# Altium PCB UmbilicalBoardV5.PcbDoc
Units mm, origin at the board's own origin, x right, y up, seen from the top; angles counter-clockwise.
Board outline 88.77 x 92.99 mm, 4 copper layers (Top Layer, GndPlane, PowerPlane, Bottom Layer), stack 0.107 mm thick; 25 components, 56 nets, 222 pads, 33 vias.
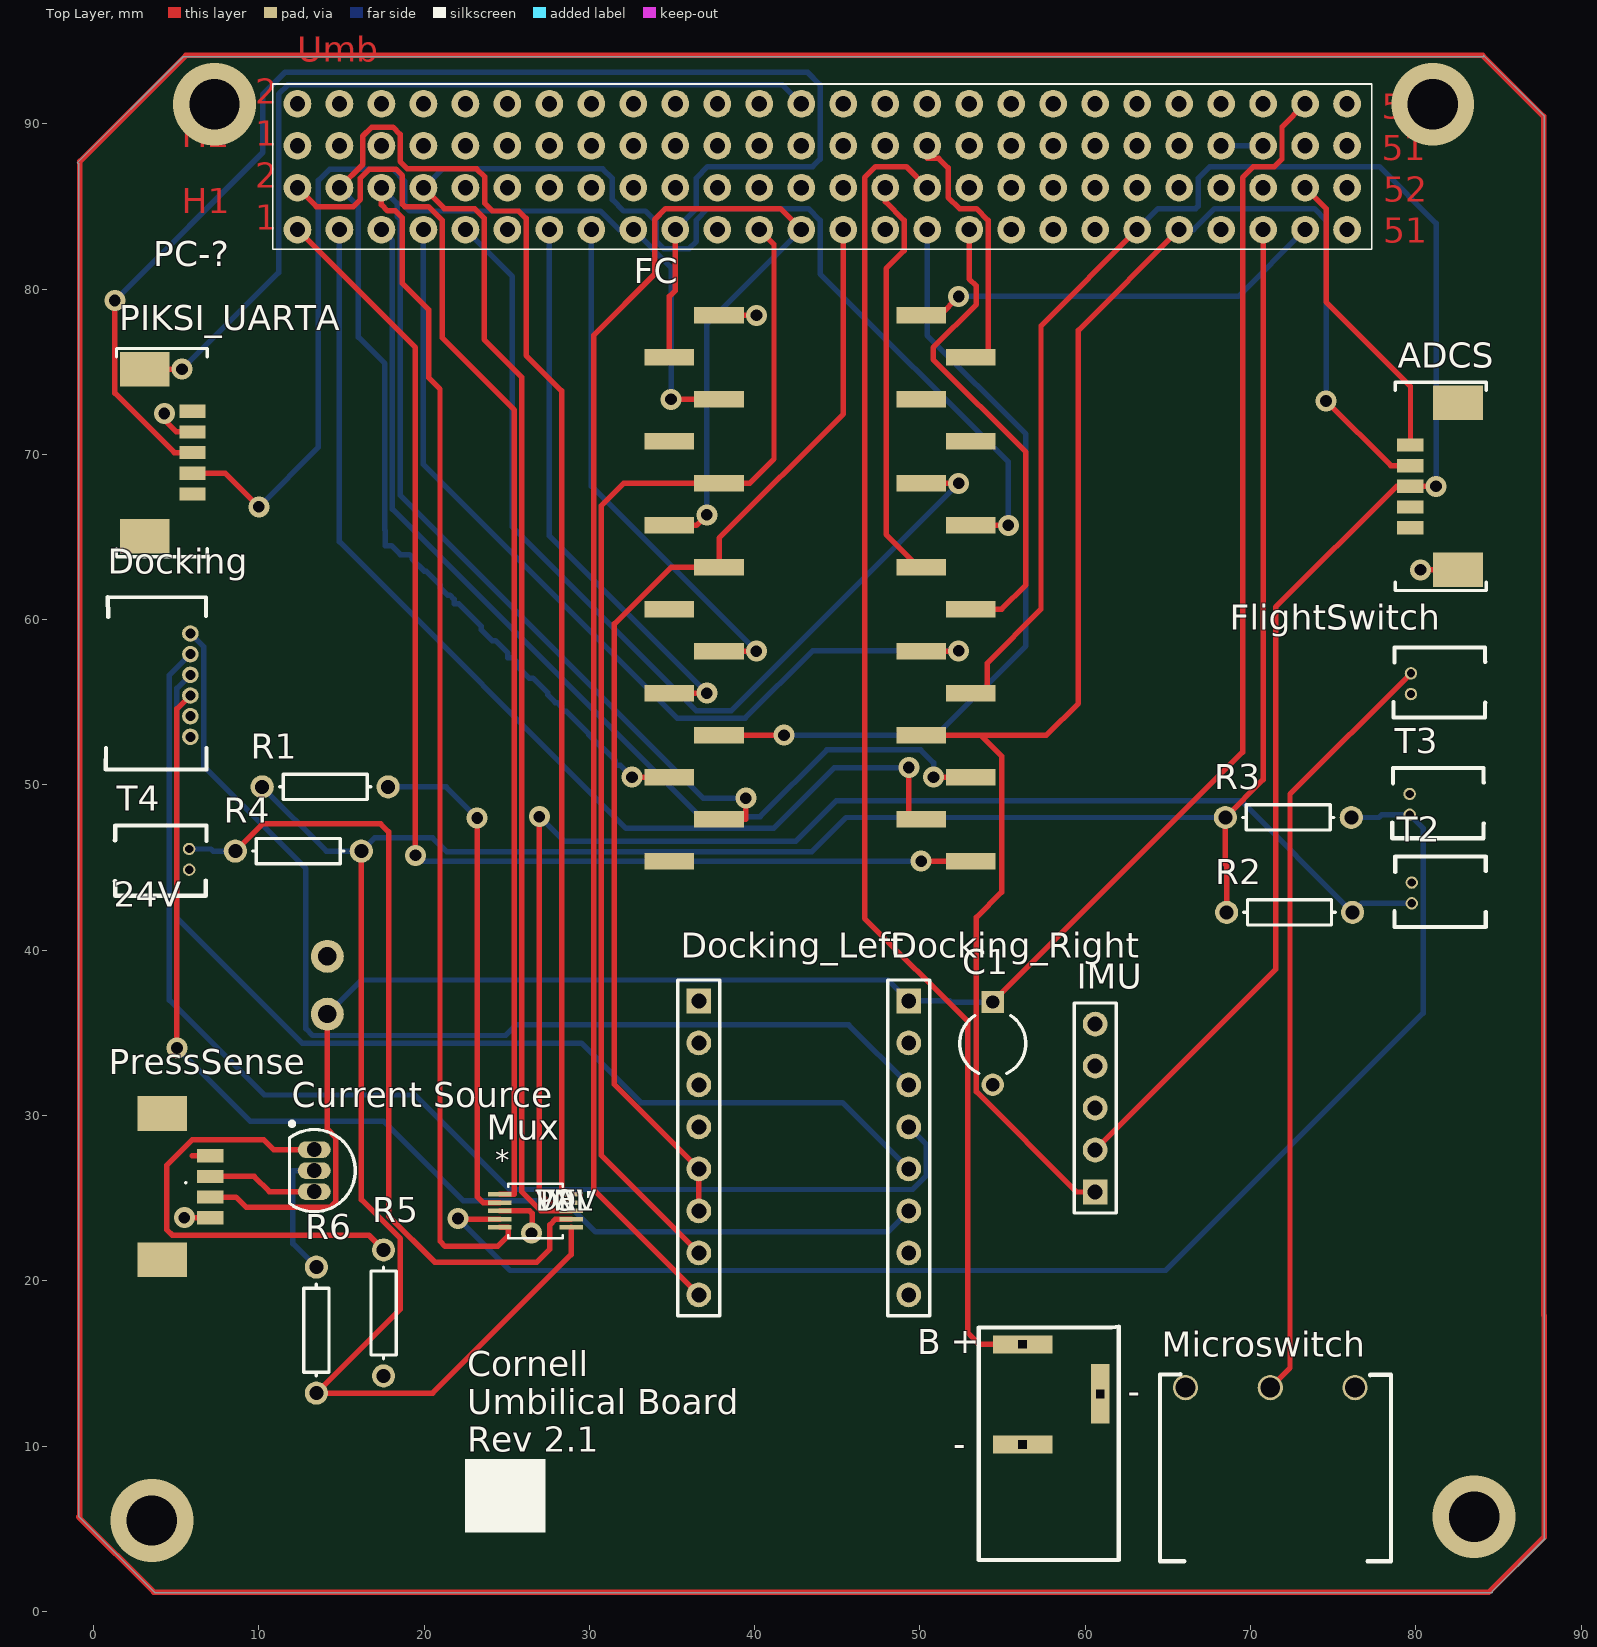
[diagram p0: Top Layer view]
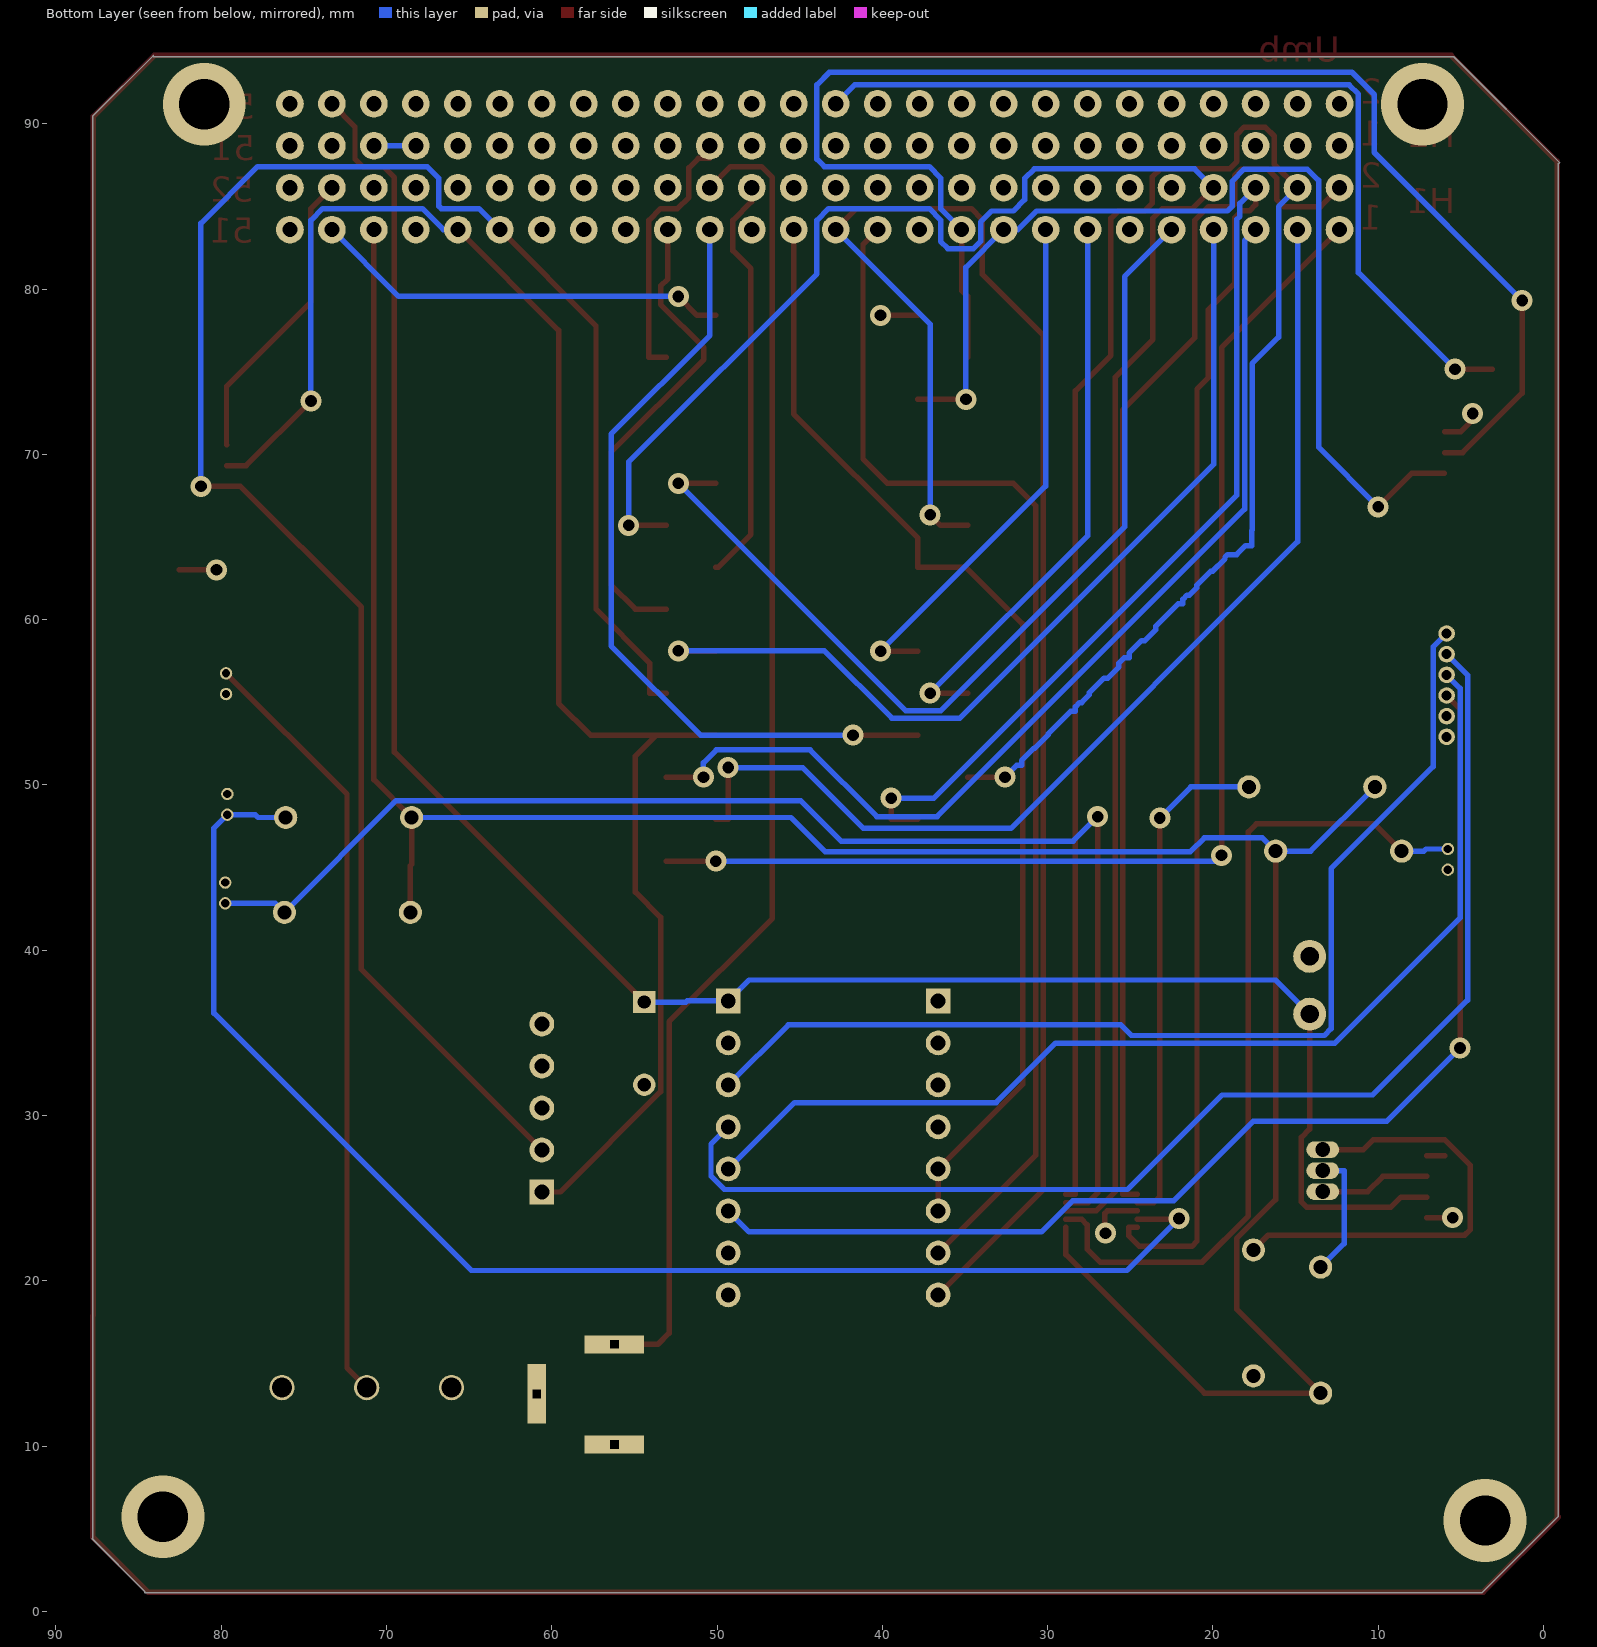
[diagram p1: Bottom Layer view, seen from below]
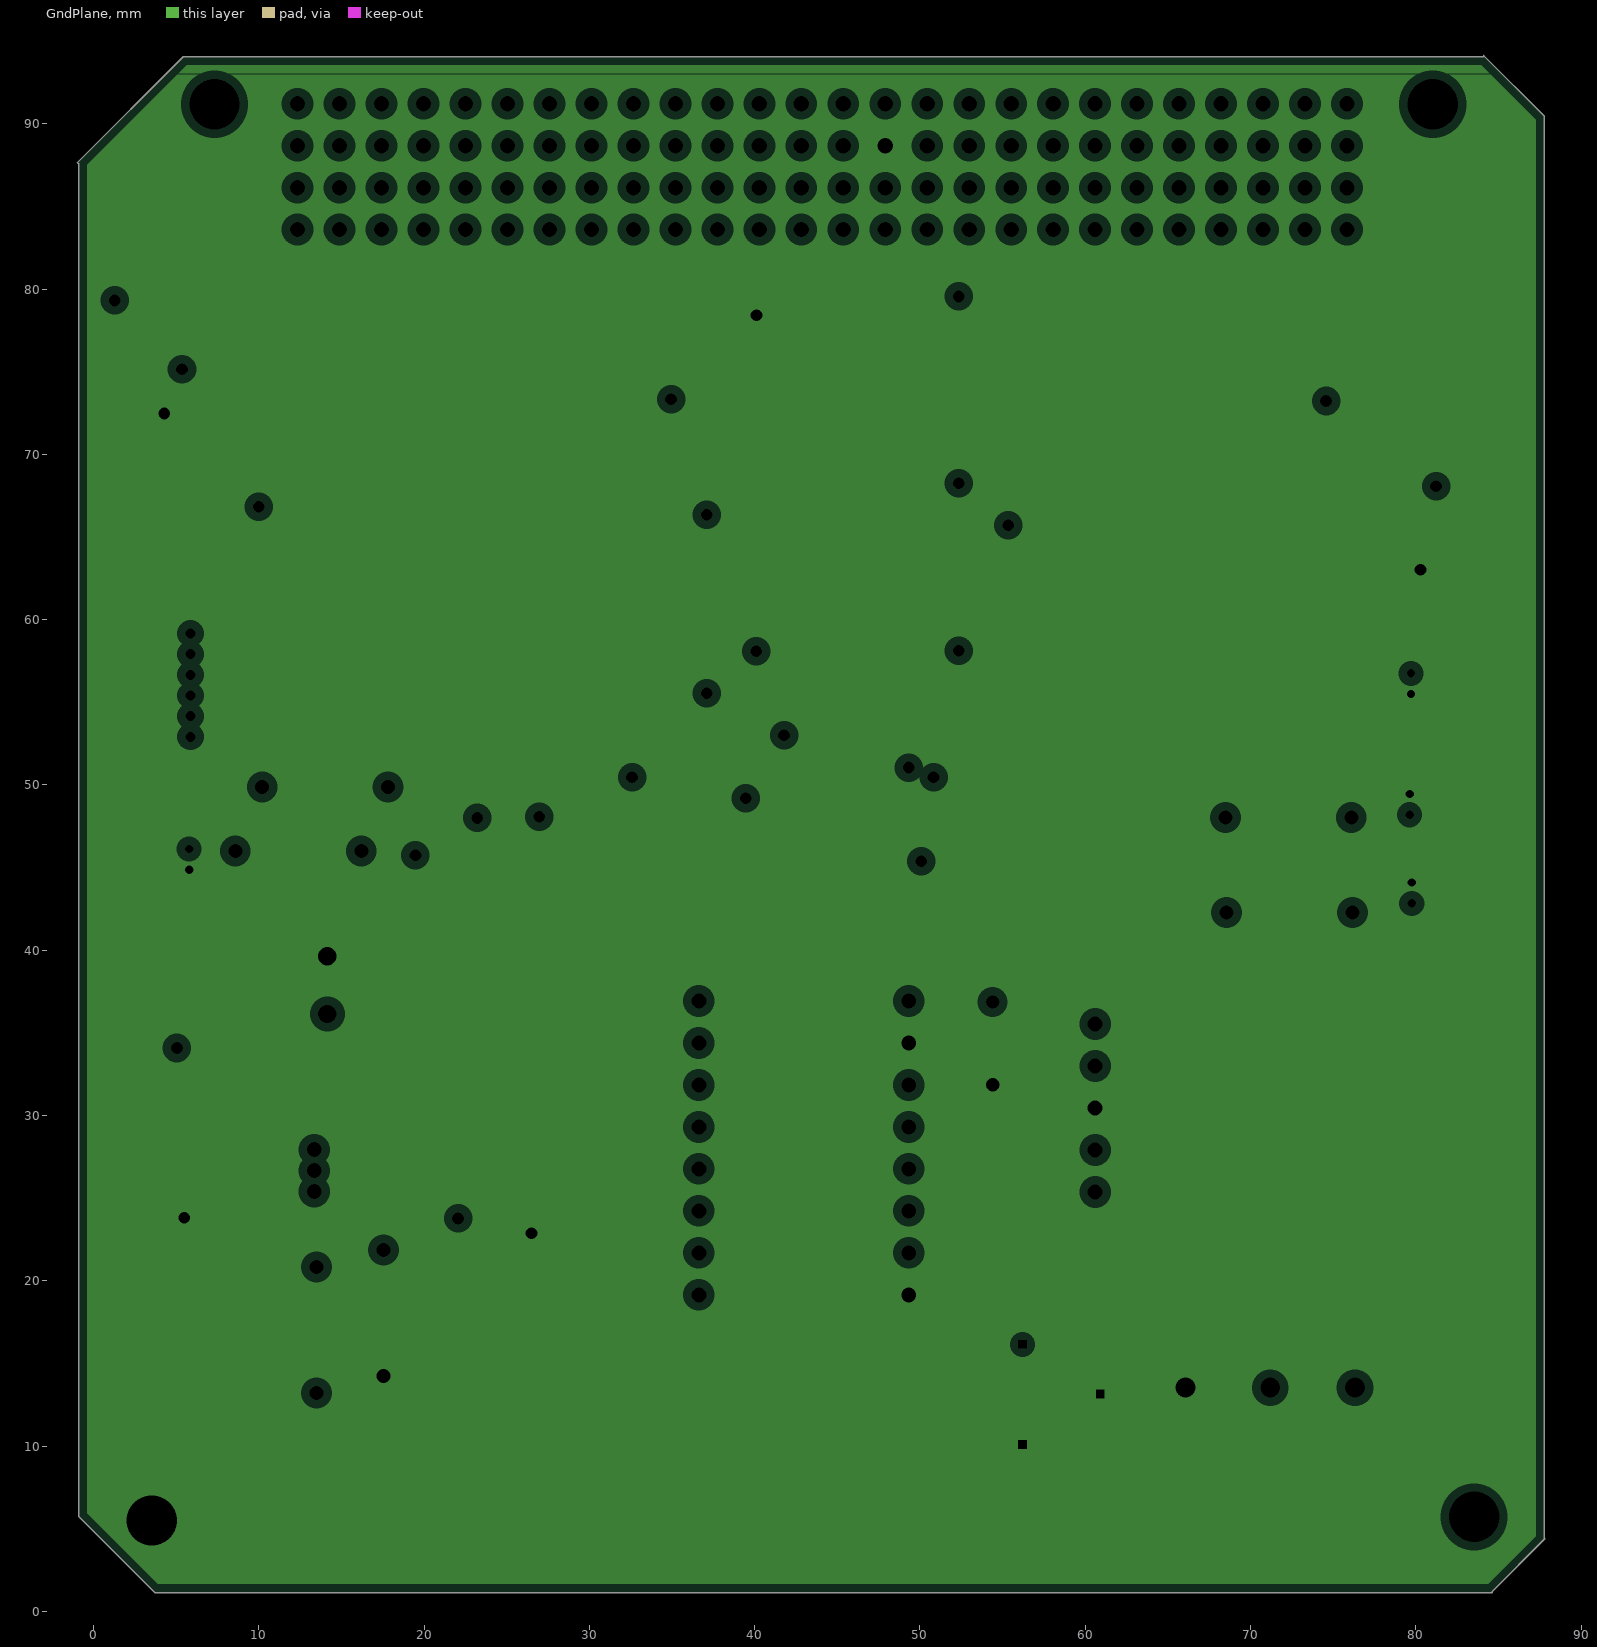
[diagram p2: GndPlane, clearances drawn from the general rule]
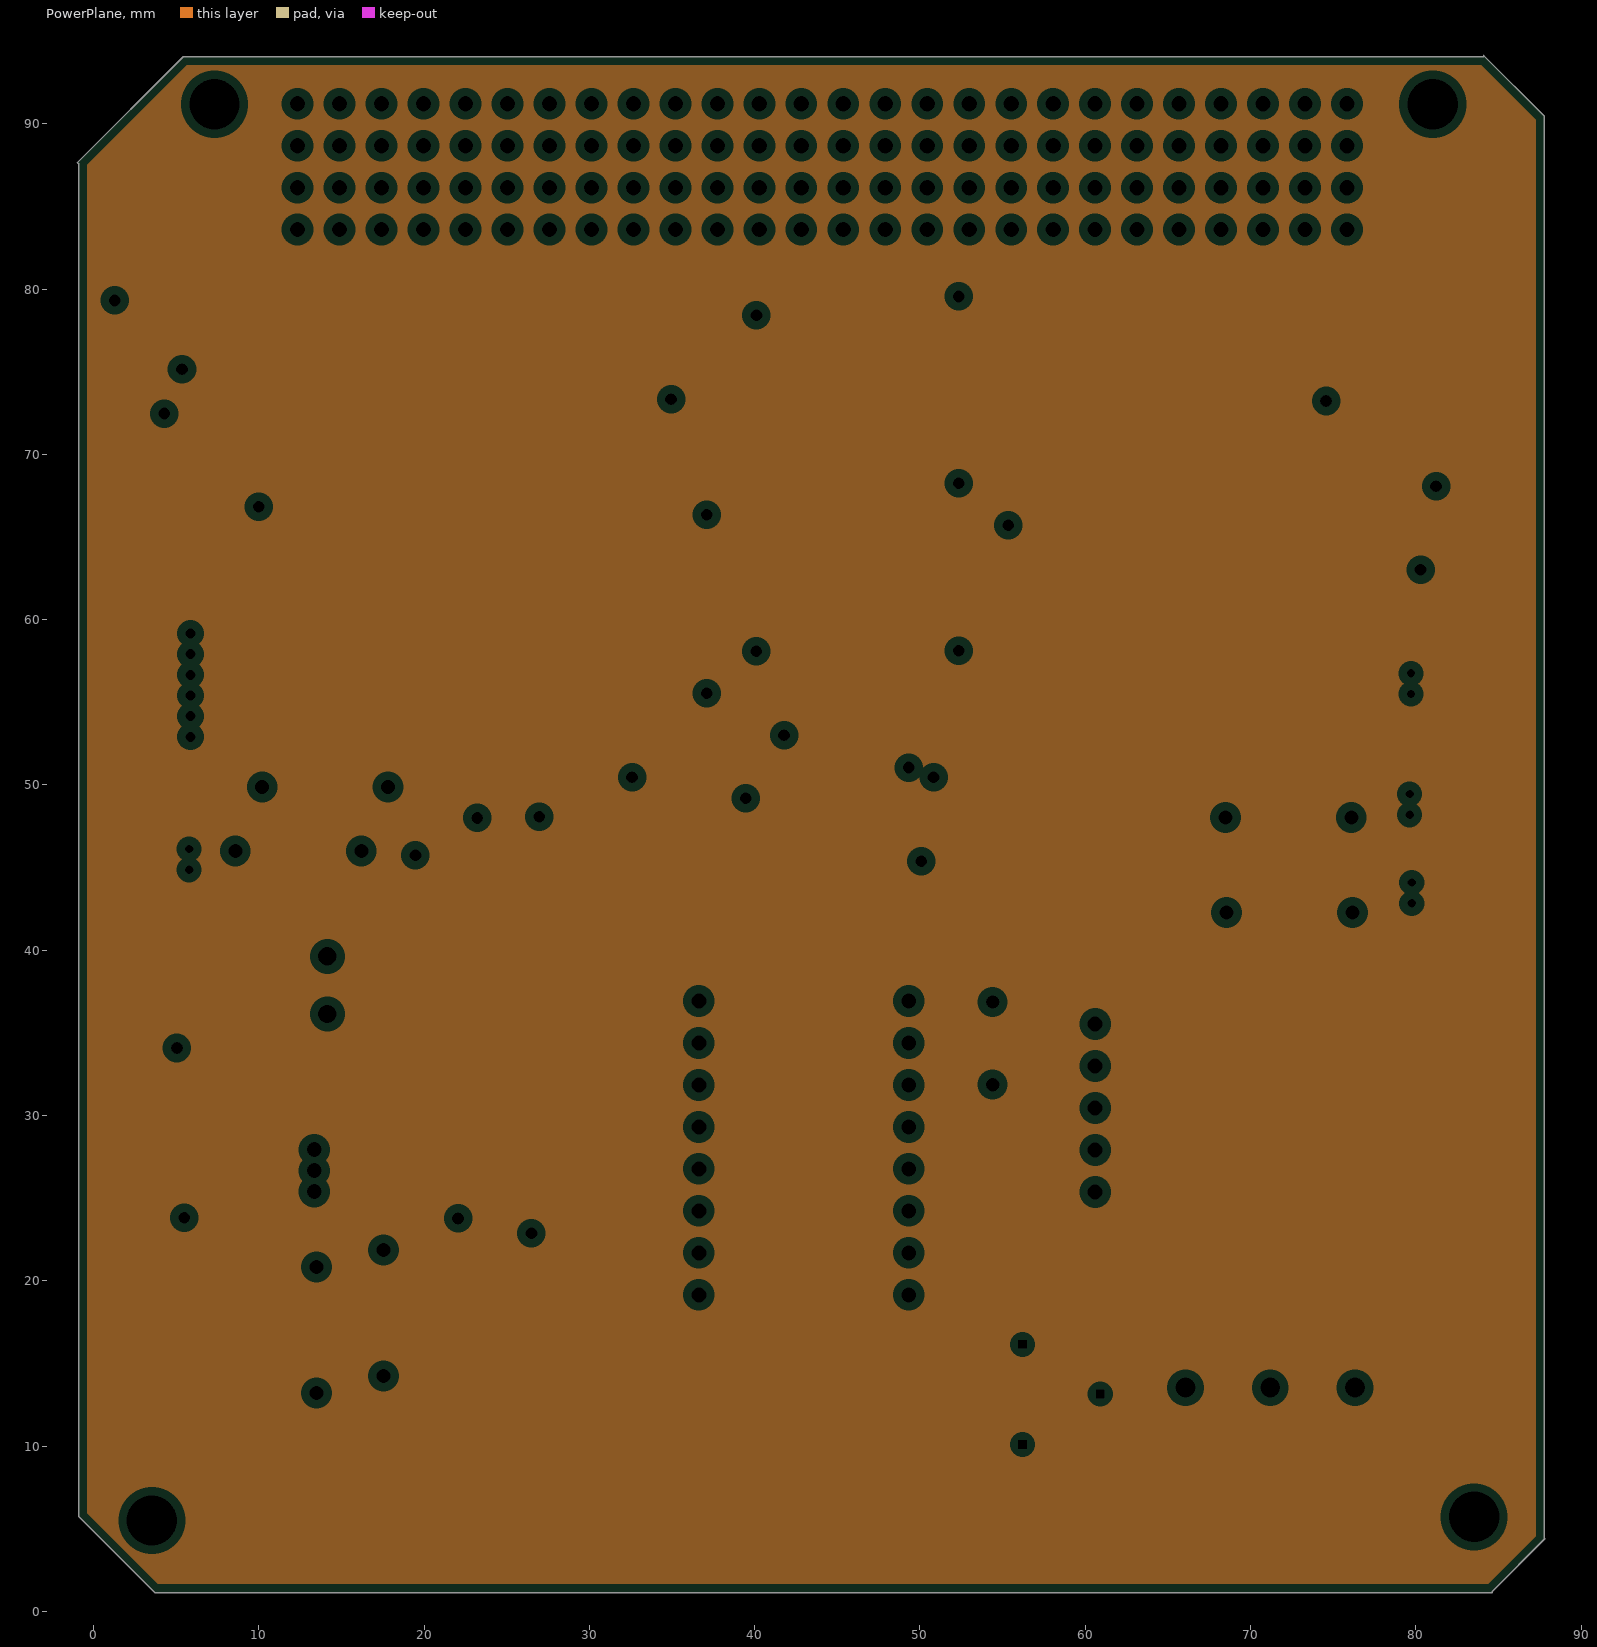
[diagram p3: PowerPlane, clearances drawn from the general rule]

## Layer stack, top to bottom
Top Solder: solder mask 0.0102, Solder Resist, Dk 3.5
Top Layer: signal copper 0.0356
GndPlane: plane copper 0.0178, net DGND
PowerPlane: plane copper 0.0178
Bottom Layer: signal copper 0.0356
Bottom Solder: solder mask 0.0102, Solder Resist, Dk 3.5

## Board outline
84.099,94.132 87.782,90.449 87.782,4.42 87.808,4.394 84.633,1.219 84.633,1.143 3.708,1.143 -0.889,5.74 -0.889,87.579 -0.965,87.655 5.436,94.056 84.099,94.056

## Design rules (kind name [scope] priority, off if disabled: settings)
Clearance [All] p1: gap=0.254 ignorepadtopadclearanceinfootprint=FALSE except(0: Arc-Hole Track-Hole SMDPad-Hole THPad-Hole Via-Hole Fill-Hole Poly-Hole Region-Hole Text-Hole; 0.127: Track-Track Track-SMDPad Track-THPad SMDPad-SMDPad SMDPad-THPad THPad-THPad)
HoleSize [All] p1: absolutevalues=TRUE maxlimit=3.048 minlimit=0.025 maxpercent=80.000 minpercent=20.000
MinimumSolderMaskSliver [All] p1: minsoldermaskwidth=0.127
PlaneClearance [All] p1: clearance=0.508
PlaneConnect [All] p1: planeconnectstyle=Direct reliefexpansion=0.508 reliefentries=4 reliefconductorwidth=0.254 reliefairgap=0.254
PolygonConnect [All] p1: connectstyle=Direct reliefconductorwidth=0.254 reliefentries=4 polygonreliefangle="90 Angle" airgapwidth=0.254
RoutingVias [All] p1: holewidth=0.711 width=1.27 viastyle="Through Hole" minholewidth=0.711 minwidth=1.27 maxholewidth=0.711 maxwidth=1.27
SilkToSolderMaskClearance [IsPad] p1: minsilkscreentomaskgap=0.05 clearancetoexposedcopper=TRUE
SolderMaskExpansion [All] p1: expansion=0.102
Width [All] p1: maxlimit=0.559 minlimit=0.305 preferedwidth=0.33
25 further rules are at their usual default settings.

## Components (designator, comment, footprint, x,y, rotation, side; value= is the part's Value field where it differs from the comment)
24V "HighVoltageHeader" Header 0.991,41.885 r270 top
ADCS "ADCS" "Molex Picoblade 5 Pin" 84.054,61.967 r90 top
B "Barrel_Jack" Barrel_Jack 56.209,10.107 r0 top
C1 "Cap2" CAPR5-4X5 54.407,34.366 r270 top value=100uF
"Current Source" "2N3904" TO-92A 13.36,26.67 r180 top
Docking "Docking 6 Pin molex" "Pressure Connector" 7.067,56.287 r270 top
Docking_Left "Docking DRV8825 Header" HDR1X8 36.627,36.932 r270 top
Docking_Right "Docking DRV8825 Header" HDR1X8 49.327,36.932 r270 top
FC "Teensy 3.2 Headers" "Teensy 3.2 SMD Headers" 34.849,78.41 r0 top
FlightSwitch "RemoverBeforeFlightSwitch" "RemoverBeforeFlight Switch" 79.705,53.549 r90 top
IMU "Header 5" HDR1X5 60.604,25.375 r90 top
Microswitch "MicroSwitch" MicroSwitch_3pin 71.246,13.588 r180 top
Mux "MAX4634EUB+T" 21-0061L 26.746,24.232 r0 top value=Value
PC-? "PC-104" PC-104FOOTPRINT 12.344,83.591 r0 top
PIKSI_UARTA "PIKSI_UART Connector" "Molex Picoblade 5 Pin" 1.594,76.204 r270 top
PressSense "Connector 4POS Molex PicoBlade" 532610471 7.061,23.82 r0 top
R1 "Resistor" AXIAL-0.3 14.021,49.886 r0 top value=1K
R2 "Resistor" AXIAL-0.3 72.365,42.291 r0 top value=1K
R3 "Resistor" AXIAL-0.3 72.288,48.031 r0 top value=1K
R4 "Resistor" AXIAL-0.3 12.395,45.999 r180 top value=1K
R5 "Resistor" AXIAL-0.3 17.551,18.059 r90 top value=2.8k
R6 "Resistor" AXIAL-0.3 13.487,17.018 r270 top value=1k
T2 "TempSensor1" "RemoverBeforeFlight Switch" 79.756,40.889 r90 top
T3 "TempSensor1" "RemoverBeforeFlight Switch" 79.629,46.249 r90 top
T4 "TempSensor2" "RemoverBeforeFlight Switch" 5.791,48.076 r270 top

## Footprints (in the part's own frame and the unit in brackets; to place one, negate y for a bottom-side part, rotate by r counter-clockwise, add the part's x,y. Pads: shape width x height; smd on the part's side, far side on the other; paste and mask are expansions set on the pad)
21-0061L [mil]
  rect 56x11 smd: 1(-85.5,39.37) 2(-85.5,19.69) 3(-85.5,0) 4(-85.5,-19.68) 5(-85.5,-39.37) 6(85.5,-39.37) 7(85.5,-19.68) 8(85.5,0) 9(85.5,19.69) 10(85.5,39.37)
  silkscreen extent -65,-65 134,65, body extent 0,0 10,10, height 10
532610471 [mm] "Connector 4POS Molex PicoBlade"
  rect 1.6x0.8 smd: 1(0,3.75) 2(0,2.5) 3(0,1.25) 4(0,0)
  rect 3x2.1 smd: ""(-2.9,-2.55) ""(-2.9,6.3)
  silkscreen extent -1.52,2.07 -1.42,2.17, body extent -4.71,-3.81 1.02,7.56, height 0.6
AXIAL-0.3 [mm] "Axial Device, Thru-Hole; 2 Leads; 0.3 in Pin Spacing"
  round 1.4 hole 0.85: 1(-3.81,0) 2(3.81,0)
  silkscreen extent -2.77,-0.76 2.77,0.76
Barrel_Jack [mm] "KLDX-0202-B"
  rect 3.6x1.1 hole 0.5 square: 0(0,0) 2(0,6.05)
  rect 1.1x3.6 hole 0.5 square: 1(4.7,3.05)
  silkscreen extent -2.65,-7 5.83,7.12
CAPR5-4X5 [mm] "Capacitor; 2 Leads"
  rect 1.35x1.35 hole 0.8: 1(-2.5,0)
  round 1.35 hole 0.8: 2(2.5,0)
  silkscreen extent -1.69,-2 1.82,2
HDR1X5 [mm] "Connector; Header; 5 Position"
  rect 1.5x1.5 hole 0.9: 1(0,0)
  round 1.5 hole 0.9: 2(2.54,0) 3(5.08,0) 4(7.62,0) 5(10.16,0)
  silkscreen extent -1.27,-1.27 11.43,1.27
HDR1X8 [mm] "Connector; Header; 8 Position"
  rect 1.5x1.5 hole 0.9: 1(0,0)
  round 1.5 hole 0.9: 2(2.54,0) 3(5.08,0) 4(7.62,0) 5(10.16,0) 6(12.7,0) 7(15.24,0) 8(17.78,0)
  silkscreen extent -1.27,-1.27 19.05,1.27
Header [mm] "High Voltage Connector"
  round 2 hole 1.1: 1(5.75,13.16) 2(2.25,13.16)
  body extent 1.02,0.89 6.86,14.6, height 0.25
MicroSwitch_3pin [mm] "Omron Electronics Inc-EMC Div D2FS-FL-N-A1"
  round 1.524 hole 1.2: 1(-5.08,0.05) 2(0.05,0.05) 3(5.18,0.05)
  silkscreen extent -7.25,-0.77 6.73,10.55, body extent -7.25,-0.75 6.73,10.55
"Molex Picoblade 5 Pin" [mm] "Molex Picoblade Header, SMT, Right Angle  53261-0571"
  rect 0.8x1.6 smd: 0(3.6,4.4) 1(4.85,4.4) 2(6.1,4.4) 3(7.35,4.4) 4(8.6,4.4)
  rect 2.1x3 smd: 5(1.05,1.5) 6(11.15,1.5)
  silkscreen extent -0.2,-0.2 12.4,5.3, body extent 0.4,0 11.8,5.2, height 3.4
PC-104FOOTPRINT [mm]
  round 1.676 hole 0.914 mask+0.076: H1_1(0,0) H1_2(0,2.54) H1_3(2.54,0) H1_4(2.54,2.54) H1_5(5.08,0) H1_6(5.08,2.54) H1_7(7.62,0) H1_8(7.62,2.54) H1_9(10.16,0) H1_10(10.16,2.54) H1_11(12.7,0) H1_12(12.7,2.54) H1_13(15.24,0) H1_14(15.24,2.54) H1_15(17.78,0) H1_16(17.78,2.54) H1_17(20.32,0) H1_18(20.32,2.54) H1_19(22.86,0) H1_20(22.86,2.54) H1_21(25.4,0) H1_22(25.4,2.54) H1_23(27.94,0) H1_24(27.94,2.54) H1_25(30.48,0) H1_26(30.48,2.54) H1_27(33.02,0) H1_28(33.02,2.54) H1_29(35.56,0) H1_30(35.56,2.54) H1_31(38.1,0) H1_32(38.1,2.54) H1_33(40.64,0) H1_34(40.64,2.54) H1_35(43.18,0) H1_36(43.18,2.54) H1_37(45.72,0) H1_38(45.72,2.54) H1_39(48.26,0) H1_40(48.26,2.54) H1_41(50.8,0) H1_42(50.8,2.54) H1_43(53.34,0) H1_44(53.34,2.54) H1_45(55.88,0) H1_46(55.88,2.54) H1_47(58.42,0) H1_48(58.42,2.54) H1_49(60.96,0) H1_50(60.96,2.54) H1_51(63.5,0) H1_52(63.5,2.54) H2_1(0,5.08) H2_2(0,7.62) H2_3(2.54,5.08) H2_4(2.54,7.62) H2_5(5.08,5.08) H2_6(5.08,7.62) H2_7(7.62,5.08) H2_8(7.62,7.62) H2_9(10.16,5.08) H2_10(10.16,7.62) H2_11(12.7,5.08) H2_12(12.7,7.62) H2_13(15.24,5.08) H2_14(15.24,7.62) H2_15(17.78,5.08) H2_16(17.78,7.62) H2_17(20.32,5.08) H2_18(20.32,7.62) H2_19(22.86,5.08) H2_20(22.86,7.62) H2_21(25.4,5.08) H2_22(25.4,7.62) H2_23(27.94,5.08) H2_24(27.94,7.62) H2_25(30.48,5.08) H2_26(30.48,7.62) H2_27(33.02,5.08) H2_28(33.02,7.62) H2_29(35.56,5.08) H2_30(35.56,7.62) H2_31(38.1,5.08) H2_32(38.1,7.62) H2_33(40.64,5.08) H2_34(40.64,7.62) H2_35(43.18,5.08) H2_36(43.18,7.62) H2_37(45.72,5.08) H2_38(45.72,7.62) H2_39(48.26,5.08) H2_40(48.26,7.62) H2_41(50.8,5.08) H2_42(50.8,7.62) H2_43(53.34,5.08) H2_44(53.34,7.62) H2_45(55.88,5.08) H2_46(55.88,7.62) H2_47(58.42,5.08) H2_48(58.42,7.62) H2_49(60.96,5.08) H2_50(60.96,7.62) H2_51(63.5,5.08) H2_52(63.5,7.62)
  silkscreen extent -1.5,-1.19 65,8.81
"Pressure Connector" [mm] "53048-0610"
  round 1 hole 0.6 mask+0.076: 1(-2.875,-1.2) 2(-1.625,-1.2) 3(-0.375,-1.2) 4(0.875,-1.2) 5(2.125,-1.2) 6(3.375,-1.2)
  silkscreen extent -5.07,-6.33 5.35,-0.22, body extent -4.45,-6.08 4.8,-0.58, height 1.75
"RemoverBeforeFlight Switch" [mm] "Molex Picoblade Part Number: 53048-0210"
  round 0.75 hole 0.5: 1(1.95,0) 2(3.205,0)
  silkscreen extent 0.53,-4.5 4.78,1.05, body extent 0.53,-4.47 4.78,1.03, height 4.05
"Teensy 3.2 SMD Headers" [mm]
  rect 3x1 smd: 1(3,0) 2(0,-2.54) 3(3,-5.08) 4(0,-7.62) 5(3,-10.16) 6(0,-12.7) 7(3,-15.24) 8(0,-17.78) 9(3,-20.32) 10(0,-22.86) 11(3,-25.4) 12(0,-27.94) 13(3,-30.48) 14(0,-33.02) 20(18.24,-33.02) 21(15.24,-30.48) 22(18.24,-27.94) 23(15.24,-25.4) 24(18.24,-22.86) 25(15.24,-20.32) 26(18.24,-17.78) 27(15.24,-15.24) 28(18.24,-12.7) 29(15.24,-10.16) 30(18.24,-7.62) 31(15.24,-5.08) 32(18.24,-2.54) 33(15.24,0)
  body extent -1.09,-34.49 19.35,1.16, height 0.25
TO-92A [mm] "TO, Flat Index; 3 In-Line, Axial Leads; Body Dia. 4.5mm; Leads 0.51 x 0.48 mm (max)"
  oval 2x1 hole 0.9: 1(0,-1.27) 2(0,0) 3(0,1.27)
  silkscreen extent -2.48,-2.95 1.5,2.48, body extent -2.48,-2.5 1.5,2.5, height 6.86

## Part data
ADCS: library part "PIKSI_UART Connector", "Molex Picoblade 53261-0571"
C1: "Capacitor", PackageDescription="Capacitor; 2 Leads", PackageReference=CAPR5-4X5, Published=23-Sep-2002, Publisher="Altium Limited"
"Current Source": "NPN General Purpose Amplifier", ComponentLink1Description="Manufacturer Link", ComponentLink1URL=http://www.fairchildsemi.com/, ComponentLink2Description=Datasheet, ComponentLink2URL=http://www.fairchildsemi.com/ds/2N%2F2N3904.pdf, DatasheetVersion=1997, LatestRevisionDate=15-Jan-2003, LatestRevisionNote="PCB Footprint 'BCY-W3/D4.7' replaced", PackageDescription="TO, Flat Index; 3 In-Line, Axial Leads; Body Dia. 4.5mm; Leads 0.51 x 0.48 mm (max)", PackageReference=TO-92A, PackageVersion=Sep-1998, Published=8-Jun-2000, Publisher="Altium Limited"
Docking: library part PressureConnector, "Molex 70553-0005"
Docking_Left Docking_Right: library part "Header 8", "Header, 8-Pin", LatestRevisionDate=17-Jul-2002, LatestRevisionNote="Re-released for DXP Platform.", Publisher="Altium Limited"
FlightSwitch: "53048-0210 Molex Picoblade"
IMU: "Header, 5-Pin", LatestRevisionDate=17-Jul-2002, LatestRevisionNote="Re-released for DXP Platform.", Publisher="Altium Limited"
Microswitch: "Omron Electronics Inc-EMC Div D2FS-FL-N-A1"
Mux: "Imported", C="Copyright (C) 2015 Accelerated Designs. All rights reserved", Manufacturer_Part_Number=MAX4634EUB+T, RefDes=RefDes, Type=Type, Vendor="Maxim Integrated Products"
PC-?: "ESQ-126-14-G-D (2 total needed)"
PIKSI_UARTA: "Molex Picoblade 53261-0571"
PressSense: library part 532610471
R1 R2 R3 R4 R5 R6: library part Res1, LatestRevisionDate=17-Jul-2002, LatestRevisionNote="Re-released for DXP Platform.", PackageDescription="Axial Device, Thru-Hole; 2 Leads; 0.3 in Pin Spacing", PackageReference=AXIAL-0.3, Published=8-Jun-2000, Publisher="Altium Limited"
T2 T3 T4: library part RemoverBeforeFlightSwitch, "53048-0210 Molex Picoblade"

## Via types
v1: diameter 1.27, hole 0.711, Top Layer to Bottom Layer, 29 vias
v2: diameter 5, hole 3.048, Top Layer to Bottom Layer, 4 vias

## Nets (pads, with @x,y where several pads share a name; then routed paths per layer and width w, separated by ;. In a path a pad name is that pad's centre, name@x,y a point inside that pad or via, vN(x,y) a via of type N, cw(c..) or ccw(c..) an arc to the next point about the centre after c; other vN are vias at no path point)
3.3_ADCS: ADCS.1
3.3_Valves135: PC-?.H2_28
3.3_Valves246: PC-?.H2_27
5_ADCS: ADCS.4 PC-?.H1_50 | length 18.2
  Top Layer w0.33: PC-?.H1_50 74.575,84.861 74.575,79.222 79.68,74.117 79.68,70.567 ADCS.4
5_IMU: PC-?.H2_25
5_Valves: PC-?.H1_48
5V_BattChargeIn: B.2 PC-?.H1_32 | length 80.7
  Top Layer w0.33: PC-?.H1_32 49.175,87.401 47.32,87.401 46.66,86.741 46.66,41.935 52.908,35.687 52.908,16.84 53.591,16.157 B.2
5V_IMU: IMU.4
5V_Piksi: PC-?.H2_26 PIKSI_UARTA.5 | length 53.7
  Top Layer w0.33: PIKSI_UARTA.5 v1(5.359,75.154)
  Bottom Layer w0.33: v1(5.359,75.154) 11.201,80.996 11.201,91.795 11.76,92.354 41.682,92.354 PC-?.H2_26
5V_Teensy1: FC.33 PC-?.H1_49 | length 25.4
  Top Layer w0.33: FC.33 51.206,78.41 v1(52.349,79.553)
  Bottom Layer w0.33: v1(52.349,79.553) 69.266,79.553 PC-?.H1_49
5V_Teensy2: PC-?.H1_51
5V_TempSensors: Mux.6 PC-?.H1_47 R1.1 R2.1 R3.1 R4.1 R6.2 | length 160.1
  Top Layer w0.33: R4.1 16.205,24.917 18.567,22.555 18.567,18.288 R6.2 20.523,13.208 28.905,21.59 28.905,23.232 Mux.6 ; R2.1 68.555,45.11 68.478,45.186 R3.1 70.764,50.317 PC-?.H1_47
  Bottom Layer w0.33: R1.1 14.097,45.999 R4.1 17.005,46.799 20.523,46.799 21.361,45.961 43.465,45.961 45.535,48.031 R3.1
24V: PC-?.H2_39
24V_1: PC-?.H2_49
24V_2: 24V.1 C1.1 Docking_Right.1 PC-?.H2_50 PressSense.3 | length 124.1
  Top Layer w0.33: PressSense.3 8.623,25.07 9.233,24.46 14.338,24.46 14.656,24.777 14.656,28.679 14.151,29.184 24V.1 ; C1.1 69.52,51.979 69.52,86.741 70.18,87.401 71.45,87.401 71.907,87.858 71.907,89.814 PC-?.H2_50
  Bottom Layer w0.33: 24V.1 16.217,38.201 48.057,38.201 Docking_Right.1 51.816,36.932 51.881,36.866 C1.1
24V_3: PC-?.H2_51
24V_4: PC-?.H2_52
24V_SAH_enable: FC.11 PC-?.H1_31 | length 48.4
  Top Layer w0.33: FC.11 v1(41.783,53.01)
  Bottom Layer w0.33: v1(41.783,53.01) 51.003,53.01 56.413,58.42 56.413,71.221 50.444,77.19 PC-?.H1_31
24V_SAH_enable2: FC.27 PC-?.H1_30 | length 24.9
  Top Layer w0.33: PC-?.H1_30 47.904,85.293 49.047,84.15 49.047,82.321 47.955,81.229 47.955,65.151 49.936,63.17 FC.27
AGND: FC.32 PC-?.H2_31 | length 16.4
  Top Layer w0.33: PC-?.H2_31 50.444,87.909 51.13,87.909 51.714,87.325 51.714,85.547 52.4,84.861 53.416,84.861 54.127,84.15 54.127,75.87 FC.32
DGND: 24V.2 ADCS.5 B.0 B.1 C1.2 Docking_Right.2 Docking_Right.8 FC.1 FlightSwitch.1 IMU.3 Microswitch.3 Mux.3 PC-?.H2_29 PIKSI_UARTA.1 PressSense.4 R5.1 T2.2 T3.2 T4.2 | length 11.7
  Top Layer w0.33: v1(4.292,72.466) 4.292,72.085 5.023,71.354 PIKSI_UARTA.1 ; v1(5.499,23.82) PressSense.4 ; Mux.3 26.39,24.232 26.535,24.087 26.535,22.92 v1(26.501,22.885) ; FC.1 v1(40.111,78.41) ; v1(80.292,63.017) ADCS.5
  other v2: 3.541,5.504
Docking1: Docking_Left.7 FC.5 PC-?.H1_23 | length 73.5
  Top Layer w0.33: Docking_Left.7 30.734,27.585 30.734,66.904 32.08,68.25 FC.5 39.7,68.25 41.173,69.723 41.173,82.703 PC-?.H1_23
Docking2: Docking_Left.8 FC.6 PC-?.H1_25 | length 101
  Top Layer w0.33: FC.6 36.474,65.71 v1(37.109,66.345) ; Docking_Left.8 30.277,25.502 30.277,77.216 33.96,80.899 33.96,84.201 34.62,84.861 41.555,84.861 PC-?.H1_25
  Bottom Layer w0.33: v1(37.109,66.345) 37.109,77.876 PC-?.H1_25
Docking_en: Docking_Left.5 Docking_Left.6 FC.7 PC-?.H1_27 | length 68.9
  Top Layer w0.33: Docking_Left.6 Docking_Left.5 31.521,31.877 31.521,59.741 34.95,63.17 FC.7 37.849,64.925 45.364,72.441 PC-?.H1_27
EPS_RX: PC-?.H2_38
EPS_TX: PC-?.H2_36
Motor1: Docking.1 Docking_Right.3 | length 65.2
  Bottom Layer w0.33: Docking.1 6.68,58.349 6.68,51.105 12.852,44.932 12.852,35.255 13.265,34.842 24.936,34.842 25.578,35.484 45.695,35.484 Docking_Right.3
Motor2: Docking.2 Docking_Right.4 | length 75.7
  Bottom Layer w0.33: Docking.2 4.597,56.642 4.597,36.981 10.336,31.242 19.456,31.242 25.171,25.527 49.556,25.527 50.369,26.34 50.369,28.269 Docking_Right.4
Motor3: Docking.3 Docking_Right.5 | length 65.6
  Bottom Layer w0.33: Docking.3 5.054,55.849 5.054,41.961 12.63,34.385 29.521,34.385 33.121,30.785 45.314,30.785 Docking_Right.5
Motor4: Docking.4 Docking_Right.6 | length 71.1
  Top Layer w0.33: v1(5.054,34.087) 5.054,54.599 Docking.4
  Bottom Layer w0.33: v1(5.054,34.087) 9.499,29.642 17.577,29.642 22.377,24.841 28.499,24.841 30.378,22.961 48.057,22.961 Docking_Right.6
mux1: Mux.2 R1.2 | length 30.6
  Top Layer w0.33: v1(23.215,48.006) 23.215,25.095 23.579,24.732 Mux.2
  Bottom Layer w0.33: R1.2 21.336,49.886 v1(23.215,48.006)
mux2: Mux.9 R2.2 T2.1 | length 82.4
  Top Layer w0.33: v1(26.975,48.082) 26.975,25.316 27.559,24.732 Mux.9
  Bottom Layer w0.33: v1(26.975,48.082) 28.46,46.596 42.5,46.596 44.95,49.047 69.418,49.047 R2.2 76.723,42.839 T2.1
mux3: Mux.4 R3.2 T3.1 | length 84.6
  Top Layer w0.33: v1(22.064,23.774) 22.107,23.732 Mux.4
  Bottom Layer w0.33: v1(22.064,23.774) 25.214,20.625 64.871,20.625 80.442,36.195 80.442,47.386 T3.1 77.942,48.199 77.775,48.031 R3.2
mux4: Mux.7 R4.2 T4.1 | length 50.4
  Top Layer w0.33: R4.2 10.236,47.65 17.373,47.65 17.856,47.168 17.856,23.927 20.65,21.133 26.822,21.133 27.61,21.92 27.61,23.389 27.952,23.732 Mux.7
  Bottom Layer w0.33: T4.1 7.112,46.126 7.239,45.999 R4.2
"NetCurrent Source_1": "Current Source.1" R5.2 | length 27.3
  Top Layer w0.33: 13.36,27.94 10.896,27.94 10.312,28.524 5.969,28.524 4.445,27 4.445,23.088 4.775,22.758 16.663,22.758 R5.2
"NetCurrent Source_2": "Current Source.2" R6.1 | length 7.7
  Bottom Layer w0.33: 13.36,26.67 12.065,26.67 12.065,22.251 R6.1
"NetCurrent Source_3": "Current Source.3" PressSense.2 | length 6.7
  Top Layer w0.33: PressSense.2 9.728,26.32 10.648,25.4 13.36,25.4
NetFlightSwitch_2: FlightSwitch.2 Microswitch.2 | length 46.7
  Top Layer w0.33: Microswitch.2 72.39,14.732 72.39,49.439 FlightSwitch.2
Piksi_RX: FC.2 PC-?.H1_19 PIKSI_UARTA.2 | length 86.5
  Top Layer w0.33: v1(1.295,79.315) 1.295,73.711 4.902,70.104 PIKSI_UARTA.2 ; FC.2 34.849,79.553 35.204,79.908 PC-?.H1_19
  Bottom Layer w0.33: v1(1.295,79.315) 10.245,88.265 10.245,91.77 11.591,93.116 43.205,93.116 43.967,92.354 43.967,87.858 43.51,87.401 37.16,87.401 36.474,86.715 36.474,84.861 PC-?.H1_19
Piksi_TX: FC.3 PC-?.H1_17 PIKSI_UARTA.3 | length 61.9
  Top Layer w0.33: PIKSI_UARTA.3 7.981,68.854 v1(10.007,66.827) ; v1(34.95,73.33) FC.3
  Bottom Layer w0.33: v1(10.007,66.827) 13.614,70.434 13.614,86.576 14.3,87.262 18.11,87.262 18.834,86.537 18.834,85.014 19.126,84.722 30.67,84.722 31.8,83.591 PC-?.H1_17 34.95,81.306 v1(34.95,73.33)
Pressure1: FC.26 PC-?.H1_33 | length 29
  Top Layer w0.33: PC-?.H1_33 52.984,80.619 53.416,80.188 53.416,79.07 50.8,76.454 50.8,75.743 56.413,70.129 56.413,62.103 54.94,60.63 FC.26
Quake_RX: FC.9 PC-?.H1_15 | length 31.9
  Top Layer w0.33: FC.9 v1(40.106,58.09)
  Bottom Layer w0.33: PC-?.H1_15 30.124,68.072 v1(40.106,58.09)
Quake_TX: FC.10 PC-?.H1_13 | length 34.2
  Top Layer w0.33: FC.10 v1(37.109,55.55)
  Bottom Layer w0.33: PC-?.H1_13 27.584,65.075 v1(37.109,55.55)
Teensy2_Reset: FC.4
Teensy2_SCL: ADCS.3 FC.23 IMU.1 PC-?.H1_43 | length 101.2
  Top Layer w0.33: FC.23 53.67,53.01 ; IMU.1 59.486,25.375 53.416,31.445 53.416,41.986 54.94,43.51 54.94,51.74 53.67,53.01 ; PC-?.H1_43 59.588,77.495 59.588,54.94 57.658,53.01 53.67,53.01 ; v1(74.574,73.228) 78.486,69.317 ADCS.3
  Bottom Layer w0.33: PC-?.H1_43 66.561,83.591 67.831,84.861 73.863,84.861 74.574,84.15 v1(74.574,73.228)
Teensy2_SDA: ADCS.2 FC.24 IMU.2 PC-?.H1_41 | length 120.9
  Top Layer w0.33: FC.24 54.076,55.55 54.076,57.378 57.328,60.63 57.328,77.775 PC-?.H1_41 ; IMU.2 71.526,38.836 71.526,60.757 78.836,68.067 ADCS.2 v1(81.229,68.067)
  Bottom Layer w0.33: PC-?.H1_41 64.414,84.861 66.675,84.861 66.827,85.014 66.827,86.69 67.538,87.401 77.8,87.401 81.229,83.972 v1(81.229,68.067)
TempMuxA0: Mux.1 PC-?.H1_2 | length 74.8
  Top Layer w0.33: PC-?.H1_2 13.488,84.988 15.722,84.988 16.154,85.42 16.154,86.715 16.7,87.262 18.3,87.262 18.694,86.868 18.694,85.141 18.847,84.988 20.269,84.988 21.107,84.15 21.107,77.038 25.463,72.682 25.463,25.232 Mux.1
TempMuxA1: FC.12 Mux.10 PC-?.H1_4 | length 125.5
  Top Layer w0.33: PC-?.H1_4 16.294,87.541 16.294,89.256 16.84,89.802 18.11,89.802 18.555,89.357 18.555,87.719 18.999,87.274 23.19,87.274 23.682,86.782 23.682,85.179 24.139,84.722 25.73,84.722 26.175,84.277 26.175,75.984 28.321,73.838 28.321,25.232 Mux.10 ; v1(32.587,50.47) FC.12
  Bottom Layer w0.33: PC-?.H1_4 16.027,84.989 16.027,77.089 17.627,75.489 17.627,65.429 17.663,65.393 17.663,64.484 18.024,64.484 18.573,63.936 19.121,63.936 19.274,63.782 19.274,63.671 20.015,62.931 20.126,62.931 20.984,62.072 20.984,61.925 21.424,61.485 21.572,61.485 21.828,61.228 21.828,60.95 22.107,60.95 23.466,59.591 23.466,59.385 24.12,58.731 24.326,58.731 25.079,57.977 25.079,57.699 25.358,57.699 25.693,57.363 25.693,57.136 26.365,56.464 26.593,56.464 27.487,55.57 27.487,55.448 27.952,54.982 28.074,54.982 28.331,54.726 28.331,54.447 28.609,54.447 29.968,53.089 29.968,53.035 30.774,52.229 30.828,52.229 31.582,51.475 31.582,51.196 31.86,51.196 v1(32.587,50.47)
TempMuxEN: FC.13 Mux.5 PC-?.H1_6 | length 121.5
  Top Layer w0.33: PC-?.H1_6 17.424,85.102 17.792,84.734 18.262,84.734 18.694,84.302 18.694,80.34 20.294,78.74 20.294,74.625 20.967,73.952 20.967,22.403 21.285,22.085 24.46,22.085 25.095,22.72 25.095,23.232 Mux.5 ; FC.13 39.471,47.93 v1(39.471,49.2)
  Bottom Layer w0.33: PC-?.H1_6 18.377,85.179 18.377,84.404 18.568,84.214 18.568,67.512 36.879,49.2 v1(39.471,49.2)
TempMuxRead: FC.28 Mux.8 PC-?.H1_8 | length 123.1
  Top Layer w0.33: PC-?.H1_8 21.235,84.861 23.063,84.861 23.635,84.29 23.635,76.949 25.92,74.663 25.92,25.387 27.076,24.232 Mux.8 ; FC.28 v1(55.346,65.71)
  Bottom Layer w0.33: PC-?.H1_8 21.107,87.274 30.81,87.274 31.394,86.69 31.394,85.407 32.08,84.722 33.388,84.722 34.061,84.048 34.061,82.88 34.493,82.448 36.042,82.448 36.474,82.88 36.474,84.175 37.16,84.861 43.256,84.861 43.967,84.15 43.967,80.924 55.346,69.545 v1(55.346,65.71)
Valve1: FC.20 PC-?.H1_1 | length 74.6
  Top Layer w0.33: PC-?.H1_1 19.482,76.454 v1(19.482,45.745) ; v1(50.076,45.39) FC.20
  Bottom Layer w0.33: v1(19.482,45.745) 19.837,45.39 v1(50.076,45.39)
Valve2: FC.21 PC-?.H1_3 | length 65.9
  Top Layer w0.33: v1(49.327,51.054) 49.327,47.93 FC.21
  Bottom Layer w0.33: PC-?.H1_3 14.884,64.719 32.232,47.371 41.148,47.371 44.831,51.054 v1(49.327,51.054)
Valve3: FC.22 PC-?.H1_5 | length 62.8
  Top Layer w0.33: v1(50.825,50.47) FC.22
  Bottom Layer w0.33: PC-?.H1_5 18.085,82.931 18.085,66.686 36.689,48.082 40.335,48.082 44.374,52.121 50.038,52.121 50.825,51.333 v1(50.825,50.47)
Valve4: FC.25 PC-?.H1_7 | length 56.9
  Top Layer w0.33: FC.25 52.324,58.09 v1(52.349,58.115)
  Bottom Layer w0.33: PC-?.H1_7 19.964,69.392 35.318,54.039 39.434,54.039 43.51,58.115 v1(52.349,58.115)
Valve5: FC.29 PC-?.H1_9 | length 58.7
  Top Layer w0.33: FC.29 v1(52.349,68.25)
  Bottom Layer w0.33: PC-?.H1_9 25.349,80.747 25.349,65.608 36.461,54.496 38.595,54.496 v1(52.349,68.25)
VBatt: PC-?.H2_45 PC-?.H2_47 | length 2.5
  Bottom Layer w0.33: PC-?.H2_45 PC-?.H2_47
pads on no net: ADCS.0 ADCS.6 Docking.5 Docking.6 Docking_Left.1 Docking_Left.2 Docking_Left.3 Docking_Left.4 Docking_Right.7 FC.8 FC.14 FC.30 FC.31 IMU.5 Microswitch.1 PC-?.H1_10 PC-?.H1_11 PC-?.H1_12 PC-?.H1_14 PC-?.H1_16 PC-?.H1_18 PC-?.H1_20 PC-?.H1_21 PC-?.H1_22 PC-?.H1_24 PC-?.H1_26 PC-?.H1_28 PC-?.H1_29 PC-?.H1_34 PC-?.H1_35 PC-?.H1_36 PC-?.H1_37 PC-?.H1_38 PC-?.H1_39 PC-?.H1_40 PC-?.H1_42 PC-?.H1_44 PC-?.H1_45 PC-?.H1_46 PC-?.H1_52 PC-?.H2_1 PC-?.H2_2 PC-?.H2_3 PC-?.H2_4 PC-?.H2_5 PC-?.H2_6 PC-?.H2_7 PC-?.H2_8 PC-?.H2_9 PC-?.H2_10 PC-?.H2_11 PC-?.H2_12 PC-?.H2_13 PC-?.H2_14 PC-?.H2_15 PC-?.H2_16 PC-?.H2_17 PC-?.H2_18 PC-?.H2_19 PC-?.H2_20 PC-?.H2_21 PC-?.H2_22 PC-?.H2_23 PC-?.H2_24 PC-?.H2_30 PC-?.H2_32 PC-?.H2_33 PC-?.H2_34 PC-?.H2_35 PC-?.H2_37 PC-?.H2_40 PC-?.H2_41 PC-?.H2_42 PC-?.H2_43 PC-?.H2_44 PC-?.H2_46 PC-?.H2_48 PIKSI_UARTA.0 PIKSI_UARTA.4 PIKSI_UARTA.6 PressSense. PressSense.1
copper on no net: | length 353.8
  Top Layer w0.33: -0.889,5.715 3.658,1.168 84.43,1.168 87.681,4.42 87.759,4.497 87.759,17.888 87.732,17.915 87.732,90.449 84.049,94.132 5.588,94.132 -0.813,87.732 -0.813,5.664 ; 5.969,27.57 7.061,27.57
  other v2: 83.526,5.721 7.326,91.179 81.026,91.179

## Polygon pours and split planes (outlines as drawn)
no net on PowerPlane (split plane): 87.272,90.238 87.272,4.58 84.345,1.653 3.92,1.653 -0.379,5.952 -0.379,87.52 5.647,93.546 83.964,93.546
DGND on GndPlane (split plane): 87.272,90.238 87.272,4.58 84.345,1.653 3.92,1.653 -0.379,5.952 -0.379,87.52 5.647,93.546 83.964,93.546

## Other copper
GndPlane (plane layer: these items are gaps in the copper):
  lines w0: 4.978,93.04 86.919,93.04
  lines w0.254: 88.443,42.57 88.697,42.824

## Silkscreen, mask and mechanical layers (free items; w line width, h text height)
Top Overlay:
  rectangle: 22.479,4.775 27.356,9.22
  text "Cornell  / Umbilical Board  / Rev 2.1" at 22.606,9.652 h1.52
Mechanical 1:
  rectangle: 59.207,24.206 84.607,36.906
Mechanical 2:
  text "Check PC104 and hole placements then lock" at 103.81,65.837 h1.52
Drill Drawing:
  text ".Legend" at 70.485,-3.708 h1.52

## Dimensions
81.026,91.179 to 75.844,91.211 on Top Layer
7.326,91.179 to 12.344,91.211 on Top Layer
7.326,91.179 to 81.026,91.179 on Top Layer
7.326,91.179 to 3.526,5.479 on Top Layer
3.526,5.479 to 7.326,91.179 on Top Layer
83.526,5.721 to 81.026,91.179 on Top Layer
83.526,5.721 to 81.026,91.179 on Top Layer
83.526,5.721 to 3.526,5.479 on Top Layer
36.627,19.152 to 49.327,19.152 on Top Layer

## Text inside footprints (layer, text, board x,y; h text height)
B: Top Overlay "+" at 51.859,15.607 h1.52; Top Overlay "-" at 62.584,12.557 h1.52; Top Overlay "-" at 52.009,9.382 h1.52
Mux: Top Overlay "*" at 24.32,26.654 h1.27; Top Overlay "PN" at 26.746,24.232 h1.27; Top Overlay "DEV" at 26.746,24.232 h1.27; Top Overlay "VAL" at 26.746,24.232 h1.27; Top Overlay "TOL" at 26.746,24.232 h1.27; Dimensions "*" at 25.603,25.679 h1.27; Dimensions "RefDes2" at 26.746,24.232 h1.27
PC-?: Top Layer "Umb" at 12.344,93.751 h1.52; Top Layer "H1" at 5.344,84.591 h1.52; Top Layer "H2" at 5.344,88.591 h1.52; Top Layer "1" at 9.804,83.591 h1.52; Top Layer "2" at 9.804,86.131 h1.52; Top Layer "1" at 9.804,88.671 h1.52; Top Layer "2" at 9.804,91.211 h1.52; Top Layer "51" at 78.044,82.791 h1.52; Top Layer "52" at 78.044,85.291 h1.52; Top Layer "51" at 77.944,87.791 h1.52; Top Layer "52" at 77.944,90.291 h1.52; Mechanical 1 "J1" at 51.751,87.485 h0.76